# Altium PCB SiLPA_HE.PcbDoc (part 7 of 10)
Units mm, origin at the board's own origin, x right, y up, seen from the top; angles counter-clockwise.
Board outline 222.47 x 100.01 mm, 4 copper layers (Top Layer, Int1 (GND), Int2 (PWR), Bottom Layer), stack 1.508 mm thick; 661 components, 355 nets, 1925 pads, 1744 vias.
Unrouted connection lines stored in the file: 360.
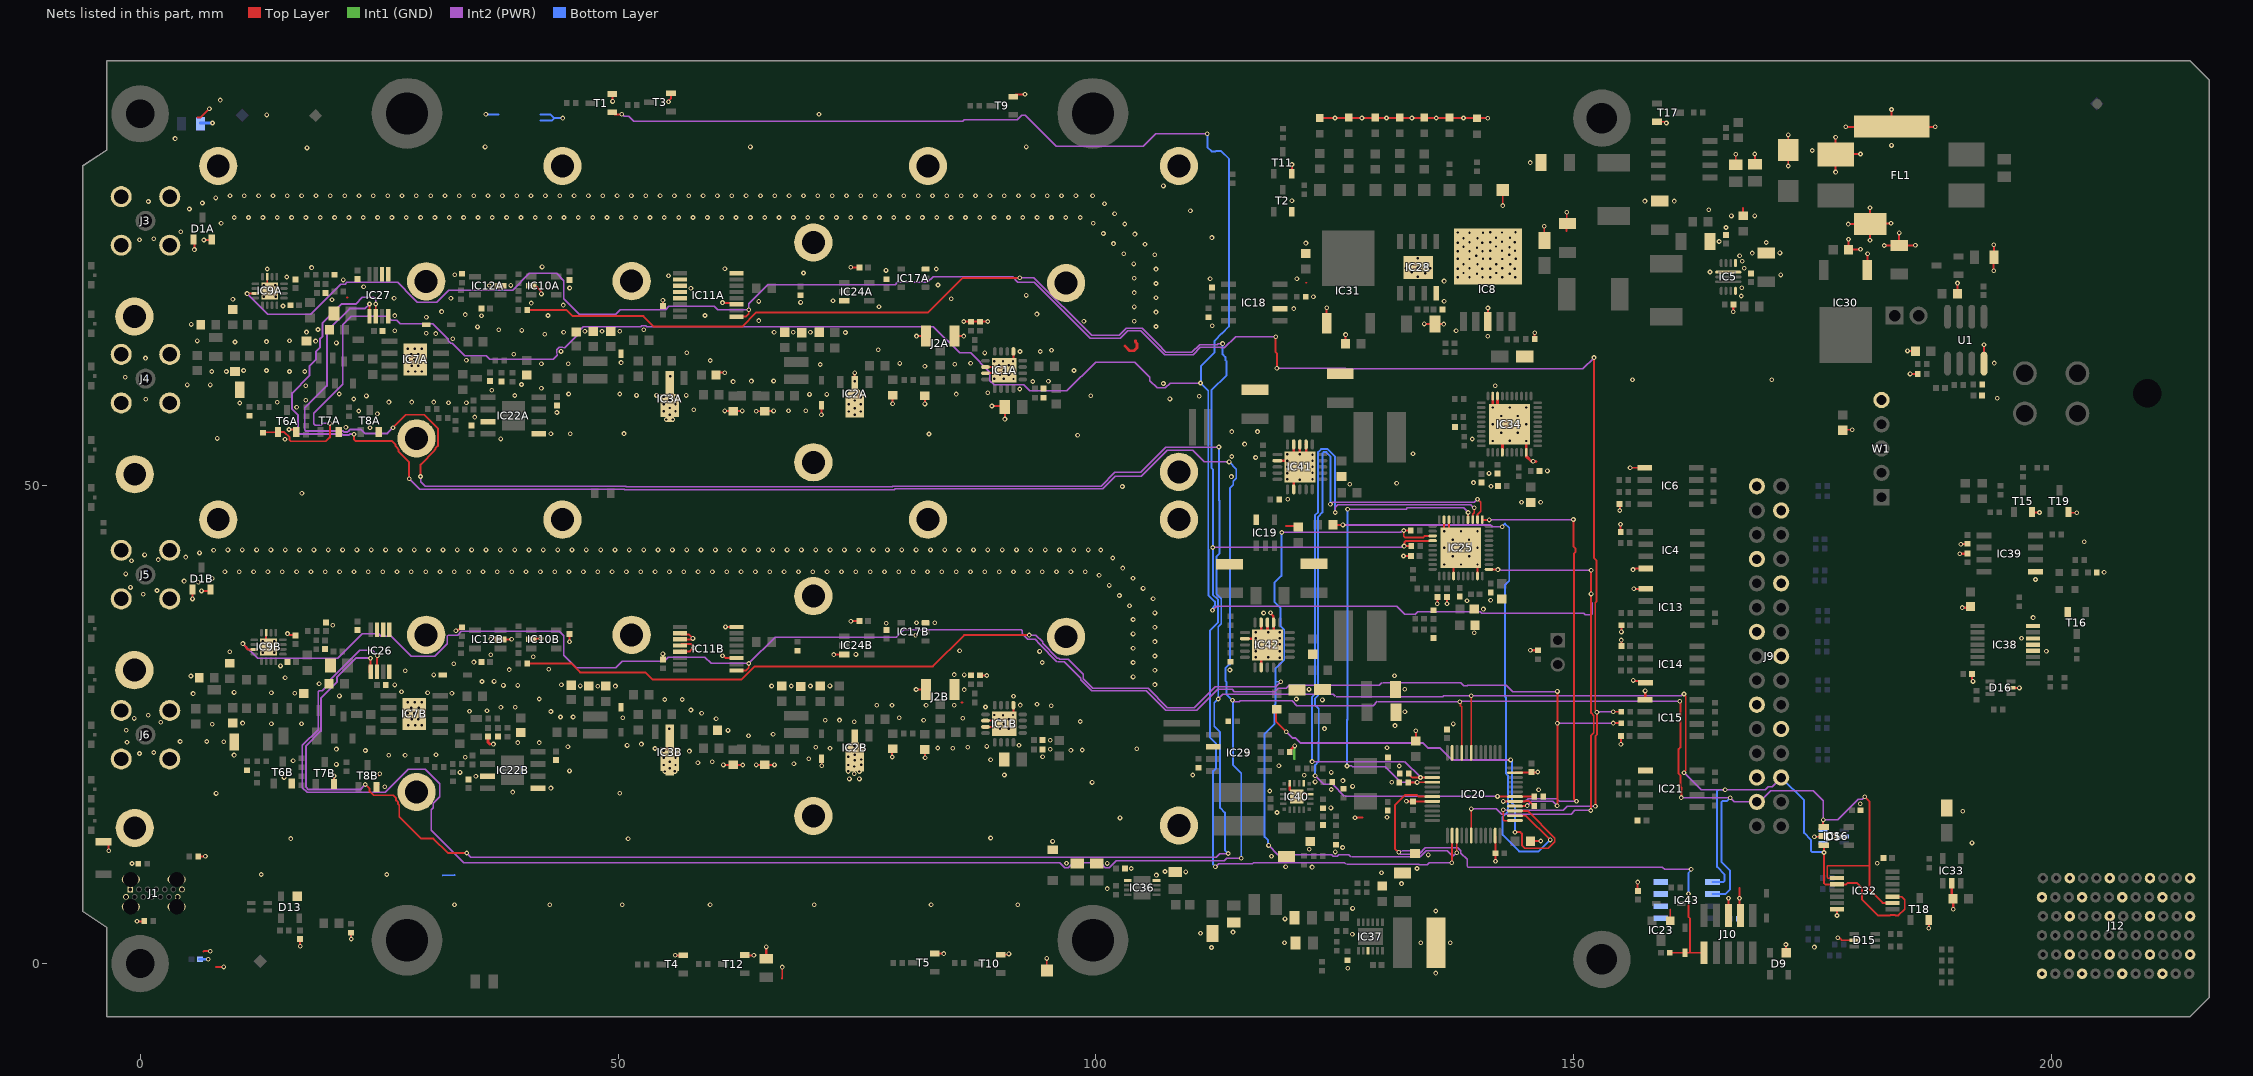
[diagram p6: the nets of this part, all layers, seen from the top]

## Via types
v1: diameter 0.5, hole 0.25, Top Layer to Bottom Layer, tented both sides, 1439 vias
v2: diameter 0.5, hole 0.25, Top Layer to Bottom Layer, tented bottom, 291 vias
v3: diameter 0.5, hole 0.25, Top Layer to Bottom Layer, 12 vias
v4: diameter 0.5, hole 0.25, Top Layer to Bottom Layer, tented top, 2 vias

## Nets (pads, with @x,y where several pads share a name; then routed paths per layer and width w, separated by ;. In a path a pad name is that pad's centre, name@x,y a point inside that pad or via, vN(x,y) a via of type N, cw(c..) or ccw(c..) an arc to the next point about the centre after c; other vN are vias at no path point) (continued)
CH0_VDD_EN: IC20.26 R171.1 | length 62.5
  Top Layer w0.2: R171.1@124.795,45.893 v1(125.832,45.893) ; IC20.26@143.838,15.468 144.984,15.468 v1(147.514,12.939)
  Int2 (PWR) w0.2: v1(125.832,45.893) 141.235,45.893 141.433,45.696 v1(142.503,45.696)
  Bottom Layer w0.2: v1(142.503,45.696) 142.503,45.751 142.786,46.034 143.238,45.583 143.238,40.029 142.784,39.575 142.784,27.928 142.896,27.816 142.896,19.859 143.09,19.666 143.09,15.902 142.544,15.356 142.544,13.452 144.267,11.728 146.303,11.728 v1(147.514,12.939)
CH1_VDD_EN: IC20.27 R172.1 | length 46.7
  Top Layer w0.2: R172.1@118.84,26.638 118.84,25.324 v1(119.915,24.249) ; v1(143.838,13.744) 144.406,13.744 144.556,13.594 144.556,12.382 144.869,12.069 147.319,12.069 147.991,12.741 147.991,13.136 145.159,15.968 IC20.27@143.838,15.968
  Int2 (PWR) w0.2: v1(119.915,24.249) 120.57,23.594 120.883,23.594 121.388,23.089 ; 121.475,23.064 134.221,23.064 134.726,22.559 135.945,22.559 137.2,21.303 v1(143.377,21.303)
  Bottom Layer w0.2: v1(143.377,21.303) 143.389,21.315 143.531,21.174 143.531,16.764 143.838,16.456 v1(143.838,13.744)
CPU_nRST: D10.2 IC20.7 J10.10 R66.2 | length 56.9
  Top Layer w0.2: v1(131.666,11.636) 131.277,12.025 131.277,16.548 132.369,17.641 133.575,17.641 133.748,17.468 IC20.7@135.188,17.468 ; R66.2@160.049,1.132 D10.2@161.609,1.132 162.154,1.132 ; v1(161.987,7.299) 161.987,4.88 162.154,4.714 162.154,1.132 ; J10.10@163.627,1.132 162.154,1.132
  Int2 (PWR) w0.15: v1(131.666,11.636) 131.761,11.636 131.891,11.765 131.909,11.765 131.955,11.811 ; v1@131.753,11.436 133.798,11.436 ; 132.041,11.786 133.848,11.786 133.936,11.698 133.936,11.574 133.798,11.436 ; v1(162.259,9.868) 159.477,9.868 159.25,10.095 138.916,10.095 138.828,10.183 138.828,10.903 138.183,11.548 138.183,11.786 137.872,12.097 134.459,12.097 133.798,11.436
  Bottom Layer w0.2: v1(161.987,7.299) 161.987,9.501 162.259,9.773 v1(162.259,9.868)
DAC_OUT1: IC20.14 IC25.24 R52A.1 R87.2 | length 189.4
  Top Layer w0.2: R52A.1@40.501,68.363 44.632,68.363 45.25,67.745 52.398,67.745 ; 51.844,67.735 52.661,67.735 53.749,66.646 62.969,66.646 64.42,68.098 73.694,68.098 73.699,68.093 82.407,68.093 86.057,71.743 v1(92.027,71.743) ; v1@132.35,43.815 132.49,43.676 ; R87.2@132.983,43.676 132.49,43.676 ; IC25.24@135.217,44.243 135.198,44.224 134.827,44.224 134.816,44.213 132.405,44.213 132.288,44.096 132.288,43.733 v1(132.231,43.676) 132.49,43.676 ; v1(137.228,10.547) 137.245,10.565 137.245,13.376 IC20.14@137.263,13.393
  Int2 (PWR) w0.15: v1(92.027,71.743) 93.506,71.743 99.533,65.717 102.441,65.717 103.188,66.463 104.816,66.463 106.447,64.832 106.451,64.832 107.316,63.967 110.038,63.967 110.834,64.762 112.693,64.762 112.769,64.839 113.224,64.839 v1(113.248,64.862) ; v1(112.224,43.529) 131.989,43.529 132.203,43.743 v1@132.215,43.743 ; v1(112.491,10.12) 112.535,10.12 112.851,10.436 116.371,10.436 116.507,10.572 125.981,10.572 126.129,10.423 ; 126.216,10.397 133.774,10.397 133.813,10.359 134.678,10.359 134.867,10.547 v1(137.228,10.547)
  Bottom Layer w0.2: v1(112.491,10.12) 112.491,10.145 112.253,10.382 112.253,20.14 112.558,20.445 112.558,23.016 111.917,23.657 111.917,34.836 112.775,35.695 112.775,38.049 112.224,38.6 v1(112.224,43.529) 112.224,51.715 112.074,51.865 112.074,59.971 113.655,61.552 113.655,63.003 113.53,63.128 113.53,63.452 113.254,63.728 113.254,64.855 v1(113.248,64.862)
DAC_OUT2: IC20.15 IC25.23 R52B.1 R88.2 | length 161.1
  Top Layer w0.2: R52B.1@40.509,31.395 45.116,31.395 46.04,30.471 52.852,30.471 53.618,29.705 62.898,29.705 64.291,31.098 82.944,31.098 86.213,34.367 v1(93.027,34.367) ; R88.2@132.927,45.303 v1(132.197,45.303) 132.197,44.712 132.339,44.57 134.246,44.57 134.419,44.743 IC25.23@135.217,44.743 ; v1(137.731,11.599) 137.747,11.615 137.747,13.377 IC20.15@137.763,13.393
  Int2 (PWR) w0.15: v1(93.027,34.367) 93.706,34.367 94.417,33.656 94.417,33.506 95.955,31.968 96.105,31.968 96.235,31.838 96.298,31.838 97.109,31.838 98.669,30.277 98.669,29.784 99.653,28.8 105.455,28.8 107.476,26.78 110.267,26.78 112.454,28.967 118.796,28.967 v1(119.32,29.491) ; v1(118.061,12.367) 119.018,11.41 124.663,11.41 124.842,11.231 125.216,11.231 125.395,11.41 126.42,11.41 126.647,11.184 ; v1(119.427,45.098) 131.897,45.098 132.103,45.303 v1(132.197,45.303) ; 126.733,11.159 133.912,11.159 134.574,11.82 136.725,11.82 136.95,11.595 137.277,11.269 137.401,11.269 v1(137.731,11.599)
  Bottom Layer w0.2: v1(118.061,12.367) 118.004,12.424 118.004,12.884 117.639,13.249 117.639,24.033 118.661,25.054 118.661,27.042 118.764,27.145 118.764,29.484 ; v1(119.32,29.491) 119.314,29.484 118.764,29.484 ; 119.34,40.542 118.656,39.858 118.656,37.842 119.298,37.2 119.298,35.318 119.697,34.919 119.697,31.798 118.764,30.865 118.764,29.484 ; 119.427,40.516 v1(119.427,45.098)
DET_RST0: IC9A.15 IC11A.1 IC20.25 R47.1 | length 223.7
  Top Layer w0.152: v1(142.613,16.099) 142.613,15.057 142.702,14.968 IC20.25@143.838,14.968
  Top Layer w0.2: v1(11.197,70.091) 12.023,70.091 IC9A.15@12.052,70.119 ; IC11A.1@62.377,67.668 62.386,67.677 63.285,67.677 63.287,67.679 63.374,67.679 63.677,67.982 v1(63.677,68.395) ; v1(118.802,65.568) 118.802,63.956 118.931,63.827 v1(118.931,62.269) ; v1(152.102,63.396) 152.102,42.421 152.373,42.15 152.373,37.906 152.228,37.761 152.228,26.55 152.406,26.371 152.406,23.946 152.252,23.791 v1(152.252,16.468) ; v1(154.105,26.343) R47.1@154.956,26.343
  Int2 (PWR) w0.15: v1(11.197,70.091) 13.351,67.937 17.86,67.937 20.502,70.58 20.519,70.58 21.01,71.071 21.442,71.071 21.638,71.267 26.937,71.267 27.724,70.48 27.724,70.464 29.014,69.173 31.04,69.173 32.308,70.441 38.972,70.441 40.731,72.201 43.581,72.201 44.336,71.445 44.336,69.551 45.95,67.937 49.749,67.937 50.229,68.417 54.968,68.417 55.322,68.771 60.061,68.771 60.437,68.395 v1(63.677,68.395) 63.677,69.041 65.641,71.005 78.989,71.005 79.236,71.252 82.344,71.252 82.954,71.861 91.268,71.861 91.839,71.29 93.544,71.29 99.396,65.437 102.485,65.437 102.488,65.44 102.556,65.44 103.302,66.186 104.701,66.186 107.2,63.687 110.154,63.687 110.922,64.455 113.048,64.455 113.095,64.409 113.435,64.409 114.621,65.594 v1@118.802,65.594 ; v1(118.931,62.269) 126.06,62.269 126.106,62.223 150.929,62.223 v1(152.102,63.396) ; v1(142.613,16.099) 142.65,16.062 148.871,16.062 149.277,16.468 v1(152.252,16.468) ; v1(152.406,26.29) 152.459,26.343 v1@154.105,26.343
DET_RST1: IC9B.15 IC11B.1 IC20.28 R45.1 | length 179.1
  Top Layer w0.2: v1(10.752,33.479) 11.117,33.113 11.117,32.99 11.235,32.873 IC9B.15@11.942,32.873 ; IC11B.1@62.377,30.668 63.301,30.668 63.302,30.669 63.389,30.669 63.677,30.957 v1(63.677,31.395) ; IC20.28@143.838,16.468 143.866,16.496 145.08,16.496 v1(145.111,16.527) ; v1(148.24,16.516) 148.27,16.545 v1(148.27,25.139) 148.27,28.469 v1(148.275,28.474) ; v1(154.105,25.158) 154.938,25.158 R45.1@154.957,25.139
  Int2 (PWR) w0.15: v1(10.752,33.479) 12.295,31.936 20.658,31.936 23.215,34.493 24.976,34.493 25.064,34.405 25.064,34.337 25.152,34.249 26.299,34.249 28.38,32.168 30.849,32.168 32.152,33.471 32.152,34.278 32.24,34.366 33.221,34.366 33.621,34.767 43.836,34.767 44.294,34.308 44.294,32.248 45.604,30.937 49.749,30.937 50.427,31.615 54.817,31.615 55.258,32.056 59.079,32.056 59.74,31.395 v1(63.677,31.395) 66.423,34.141 79.125,34.141 79.905,34.921 92.186,34.921 92.274,34.833 92.274,34.481 92.84,33.915 93.628,33.915 94.117,33.427 94.117,33.382 95.92,31.579 ; 95.985,31.559 96.702,31.559 98.392,29.869 98.392,29.669 99.536,28.525 105.282,28.525 107.302,26.505 110.558,26.505 112.74,28.687 114.26,28.687 114.491,28.456 118.709,28.456 119.049,28.796 119.882,28.796 120.222,29.136 129.646,29.136 129.903,29.392 ; 129.99,29.367 138.15,29.367 138.455,29.062 138.829,29.062 138.897,29.13 142.918,29.13 143.616,28.431 148.232,28.431 v1(148.275,28.474) ; v1(145.111,16.527) 145.558,16.975 147.781,16.975 v1(148.24,16.516) ; v1(148.27,25.139) 148.279,25.149 154.095,25.149 v1(154.105,25.158)
EEM0_I2C.SCL: D5.6 IC16.1 IC20.45 IC26.2 IC27.2 IC32.2 IC32.9 IC43.6 J9.27 | length 417.9
  Top Layer w0.152: IC32.2@177.527,8.943 176.573,8.943 176.48,9.036 176.48,10.159 176.573,10.252 180.925,10.252
  Top Layer w0.2: v1(22.372,55.382) 22.372,54.832 22.513,54.691 26.325,54.691 26.708,54.308 26.708,54.169 26.945,53.932 26.945,53.866 27.029,53.782 27.029,53.573 28.146,52.456 v1(28.146,50.731) ; IC27.2@24.65,67.727 v1(24.65,69.001) ; IC26.2@24.775,30.525 24.802,30.552 24.802,32.193 v1(24.829,32.219) ; v1(138.051,27.399) 138.118,27.332 138.118,26.994 138.263,26.849 IC20.45@138.263,22.043 ; v1(161.067,27.439) 161.13,27.376 161.13,22.623 160.955,22.448 160.955,19.859 161.154,19.659 161.154,18.535 161.24,18.449 v1(161.24,17.36) ; J9.27@169.052,17.043 J9.27@169.452,17.043 ; v1(176.074,15.032) 176.074,14.351 IC16.1@176.137,14.287 ; v1(180.427,17.443) 180.925,16.945 180.925,10.252 180.925,7.722 182.304,6.343 IC32.9@183.327,6.343
  Int2 (PWR) w0.15: v1(24.829,32.219) 24.282,32.766 22.966,32.766 19.457,29.256 19.457,28.967 19.03,28.54 18.74,28.54 18.619,28.418 18.619,24.468 16.97,22.819 16.97,18.418 17.488,17.9 25.626,17.9 28.038,20.311 29.845,20.311 31.346,18.811 31.346,17.451 30.658,16.763 30.658,16.303 30.454,16.099 30.454,13.944 33.85,10.547 96.224,10.547 96.727,10.045 97.102,10.045 97.605,10.547 100.474,10.547 100.99,10.032 101.364,10.032 102.108,10.775 113.443,10.775 113.693,11.026 v1(115.195,11.026) ; v1(28.146,50.731) 29.265,49.612 50.663,49.612 50.707,49.568 78.905,49.568 79.012,49.675 100.728,49.675 101.872,50.819 101.875,50.819 102.03,50.975 104.735,50.975 107.45,53.689 110.111,53.689 111.321,52.48 v1(113.924,52.48) ; v1(114.279,27.548) 114.366,27.548 114.542,27.372 114.969,27.372 115.096,27.498 120.514,27.498 121.024,26.989 128.999,26.989 129.435,27.424 ; 129.522,27.399 v1(138.051,27.399) 138.071,27.419 161.047,27.419 v1(161.067,27.439) ; v1(161.24,17.36) 161.249,17.351 166.323,17.351 v1@166.353,17.321 ; v1(166.353,17.341) 166.773,16.921 J9.27@169.141,16.921 ; J9.27@169.455,16.921 170.602,18.068 175.052,18.068 176.074,17.047 v1@176.074,15.217 ; v1(176.074,15.032) 177.627,15.032 179.765,17.17 180.154,17.17 v1(180.427,17.443)
  Int2 (PWR) w0.2: v1@22.361,55.382 21.934,55.382 21.858,55.307 21.196,55.307 21.12,55.382 16.681,55.382 16.51,55.553 16.51,57.39 15.897,58.004 15.897,59.687 17.704,61.495 17.704,62.505 18.418,63.22 18.418,64.062 18.834,64.478 18.834,65.392 19.083,65.641 19.083,67.023 21.053,68.993 22.535,68.993 23.248,69.706 24.422,69.706 24.65,69.478 v1(24.65,69.001)
  Bottom Layer w0.15: D5.6@176.074,13.949 D5.6@176.08,13.943
  Bottom Layer w0.2: 113.921,31.296 113.531,30.906 113.531,29.601 113.644,29.488 113.644,28.183 v1(114.279,27.548) ; v1(113.924,52.48) 114.677,51.727 114.677,50.773 114.361,50.458 114.361,50.101 114.008,49.748 114.008,31.271 ; v1@114.343,27.548 114.343,20.764 115.195,19.912 v1(115.195,11.026) ; IC43.6@164.492,7.273 165.852,7.273 166.312,7.732 166.312,9.738 165.422,10.628 165.422,16.884 165.539,17.001 166.013,17.001 v1(166.353,17.341) ; D5.6@176.074,13.949 v1(176.074,15.032)
EEM0_I2C.SDA: D5.4 IC16.3 IC20.43 IC26.1 IC27.1 IC32.3 IC32.10 IC43.5 J9.26 | length 405
  Top Layer w0.2: v1(23.552,18.735) 24.016,18.272 24.016,18.014 24.423,17.607 26.458,17.607 26.78,17.285 26.78,17.062 26.985,16.856 26.985,16.693 27.108,16.57 27.108,15.402 27.108,15.371 27.167,15.313 29.398,13.082 30.674,13.082 32.183,11.573 v1(34.163,11.573) ; IC26.1@23.999,30.471 23.999,31.116 24.103,31.221 v1(24.103,31.948) ; IC27.1@24,67.727 v1(24,69.001) ; v1(26.454,56.054) 27.816,57.416 29.724,57.416 31.154,55.987 31.154,54.15 30.891,53.887 30.891,53.832 30.815,53.757 30.815,53.685 29.339,52.208 v1(29.339,50.958) ; IC20.43@139.263,22.043 v1(139.263,28.021) ; v1(161.52,19.968) 161.52,20.049 161.702,20.231 161.702,27.944 161.52,28.126 v1(161.52,28.207) ; IC16.3@176.265,12.424 176.158,12.318 v1(176.158,11.623) 176.158,8.427 176.292,8.293 IC32.3@177.527,8.293 178.488,8.293 178.615,8.42 179.632,8.42 180.13,7.922 180.13,6.71 181.805,5.035 183.091,5.035 183.155,5.099 183.55,5.099 183.614,5.035 183.955,5.035 184.607,5.686 184.607,6.659 184.273,6.993 IC32.10@183.327,6.993
  Int2 (PWR) w0.15: v1(29.339,50.958) 29.339,50.41 29.812,49.937 50.798,49.937 50.842,49.893 78.663,49.893 78.72,49.95 100.54,49.95 101.985,51.395 104.66,51.395 107.305,54.039 v1(112.862,54.039) ; v1(34.163,11.573) 34.593,11.143 112.573,11.143 112.945,11.515 v1(113.84,11.515) ; v1(112.789,27.682) 113.284,28.177 124.829,28.177 125.055,27.951 ; 125.142,27.926 136.273,27.926 136.368,28.021 v1(139.263,28.021) 161.24,28.021 161.426,28.207 v1(161.52,28.207) ; v1(161.52,19.968) 163.3,18.188 v1(165.812,18.188) 169.995,18.188 170.316,18.51 170.73,18.51 J9.26@171.681,19.461
  Int2 (PWR) w0.2: v1(23.552,18.735) 23.024,18.207 17.608,18.207 17.367,18.448 17.367,22.789 18.921,24.343 18.921,27.772 20.619,29.47 20.619,29.991 22.576,31.948 v1(24.103,31.948) ; v1(24,69.001) 23.519,68.52 21.911,68.52 19.532,66.141 19.532,60.438 17.227,58.133 17.227,55.825 17.345,55.707 21.255,55.707 21.33,55.632 21.724,55.632 21.799,55.707 21.802,55.707 21.952,55.857 23.119,55.857 23.511,55.466 25.866,55.466 v1(26.454,56.054)
  Bottom Layer w0.2: v1(112.862,54.039) 112.862,48.475 112.936,48.401 112.936,42.917 112.592,42.573 112.592,38.695 113.102,38.184 113.102,35.559 112.789,35.246 v1(112.789,27.682) 112.369,27.262 112.369,24.84 112.99,24.219 112.99,16.295 113.485,15.799 113.485,11.87 v1(113.84,11.515) ; IC43.5@164.492,8.543 165.649,8.543 165.766,8.66 165.766,9.317 164.972,10.112 164.972,18.071 165.089,18.188 v1(165.812,18.188) ; J9.26@171.681,19.461 174.081,17.061 174.081,13.67 174.798,12.953 174.798,11.797 174.916,11.68 176.101,11.68 v1(176.158,11.623) 176.158,12.564 D5.4@176.08,12.643
GND: B5A.1 B5B.1 B6A.1 B6B.1 B7A.1 B7B.1 B8A.1 B8B.1 B9A.1 B9B.1 B10A.1 B10B.1 B11A.1 B11B.1 B12A.1 B12B.1 B13A.1 B13B.1 B14A.1 B14B.1 B15A.1 B15B.1 B16A.1 B16B.1 B17A.1 B17B.1 C2A.1 C2B.1 C4A.1 C4B.1 C5A.1 C5B.1 C6A.1 C6B.1 C7A.1 C7B.1 C8A.1 C8B.1 C9A.1 C9B.1 C10.1 C17A.2 C17B.2 C18A.1 C18B.1 C19A.1 C19B.1 C21.1 C22.1 C23.1 C24.1 C25.1 C27.2 C28.1 C29.1 C30.1 C31.2 C32.1 C33.1 C34.1 C35.1 C36.2 C37.1 C38.1 C39.1 C40.1 C42A.1 C42B.1 C43A.1 C43B.1 C45A.1 C45B.1 C46A.1 C46B.1 C47A.1 C47B.1 C48A.1 C48B.1 C53A.1 C53B.1 C55A.2 C55B.2 C56A.1 C56B.1 C57A.2 C57B.2 C58A.1 C58B.1 C59A.1 C59B.1 C60A.2 C60B.2 C61A.1 C61B.1 C62.1 C63.1 C64.1 C65.1 C66.2 C68.1 C69.1 C70.1 C71.2 C72.2 C73.2 C74.1 C75.1 C76.1 C77.2 C78.1 C79.2 C80.2 C81.2 C82.1 C83.1 C84.1 C85.1 C87.1 C88.2 C89.1 C90.1 C91.1 C92.1 C93.1 C94.1 C95.1 C96.2 C97.1 C98.1 C100.1 C101.1 C102.1 C103.1 C104.1 C105.1 C106.2 C107.2 C112.1 C113.1 C114.1 C116.1 C117A.1 C117B.1 C118A.1 C118B.1 C120A.1 C120B.1 C121A.1 C121B.1 C123.1 C124.1 C125.1 C126.1 C127.1 C128.1 C129.1 C132.2 C135.1 C136.1 C137.1 C138.1 C139.1 C140.1 C141.1 C142.2 C144.1 C145.1 C146.1 C147.1 C149.1 C154.1 C155.1 C165.1 C166.1 C167.1 C245A.2 C245B.2 D1A.1 D1A.2 D1B.1 D1B.2 D2A.1 D2B.1 D3A.1 D3B.1 D4.2 D5.2 D8A.1 D8B.1 D9.1 D13.1 D15.2 D16.2 D18A.2 D18B.2 D19.1 FL1.4 IC1A.5 IC1A.10 IC1A.11 IC1A.17 IC1B.5 IC1B.10 IC1B.11 IC1B.17 IC2A.2 IC2B.2 IC3A.2 IC3A.4 IC3B.2 IC3B.4 IC4.4 IC5.3 IC5.4 IC5.11 IC6.5 IC7A.9 IC7B.9 IC8.3 IC8.6 IC9A.11 IC9A.17 IC9B.11 IC9B.17 IC10A.2 IC10B.2 IC11A.3 IC11A.8 IC11A.10 IC11A.11 IC11A.12 IC11A.13 IC11B.3 IC11B.8 IC11B.10 IC11B.11 IC11B.12 IC11B.13 IC12A.2 IC12B.2 IC13.5 IC14.4 IC15.5 IC16.2 IC17A.3 IC17B.3 IC18.2 IC19.5 IC20.8 IC20.23 IC20.35 IC20.47 IC21.5 IC22A.3 IC22A.5 IC22B.3 IC22B.5 IC23.1 IC24A.3 IC24B.3 IC25.18 IC25.19 IC25.34 IC25.39 IC25.41 IC26.4 IC26.5 IC26.6 IC26.7 IC27.4 IC27.5 IC27.6 IC28.8 IC28.9 IC29.2 IC30.1 IC31.1 IC32.7 IC33.2 IC34.18 IC34.19 IC34.34 IC34.39 IC34.41 IC36.4 IC36.5 IC37.9 IC38.3 IC38.4 IC38.5 IC38.7 IC39.1 IC40.3 IC40.5 IC40.8 IC40.17 IC41.2 IC41.7 IC41.17 IC41.18 IC41.19 IC41.21 IC42.2 IC42.7 IC42.17 IC42.18 IC42.19 IC42.21 IC43.1 IC43.2 IC43.3 IC43.4 J1.1 J1.2 J1.3 J1.4 J1.A1 J1.A12 J1.B1 J1.B12 J2A.2 J2B.2 J3.2 J4.2 J5.2 J6.2 J9.1 J9.4 J9.7 J9.10 J9.13 J9.16 J9.19 J9.22 J9.25 J10.3 J10.5 J12.A2 J12.A4 J12.A6 J12.C1 J12.C5 J12.D2 J12.D4 J12.D6 J12.F1 J12.F5 J12.G2 J12.G4 J12.G6 J12.I1 J12.I5 J12.J2 J12.J4 J12.J6 J12.L1 J12.L5 L20.2 LD11.1 LD12.1 LD13.1 LD14.1 LD15.1 LD16.1 LD18.1 R1A.1 R1B.1 R2A.1 R2B.1 R7A.1 R7B.1 R8A.1 R8B.1 R9A.1 R9B.1 R10A.1 R10B.1 R13.2 R27A.1 R27B.1 R30.1 R33A.1 R33B.1 R58.1 R63.2 R68.1 R70.2 R76.1 R77.1 R78.1 R81.1 R83.1 R91.1 R94.2 R95.2 R131.2 R132.1 R136.2 R141A.1 R141B.1 R144.1 R152.1 R157.1 R161.1 R164A.1 R164B.1 R166A.1 R166B.1 R174.2 R175.2 R176.2 R177.2 R180.2 R181.2 SW1.2 T1.2 T2.2 T3.2 T4.2 T5.2 T6A.2 T6B.2 T7A.2 T7B.2 T8A.2 T8B.2 T9.2 T10.2 T11.2 T12.2 T15.2 T16.2 T17.2 T18.2 T19.2 TP22.1 TP23.1 U1.4 W1.5 | length 259.3
  Top Layer w0.2: SW1.2@-4.073,12.763 -3.623,12.763 -3.323,12.463 -3.323,11.843 v1(-3.275,11.795) ; v1(-0.323,4.418) 0.402,4.418 R95.2@0.427,4.443 ; D1B.1@5.477,39.13 5.483,39.124 v1(5.483,38.153) ; v1(5.677,74.693) 5.677,75.648 D1A.1@5.589,75.736 D1A.1@5.692,75.839 ; 5.977,88.533 6.341,88.533 v1(7.248,89.44) ; R13.2@6.097,11.197 6.118,11.218 v1(6.827,11.218) ; v1(6.427,38.987) 7.234,38.987 D1B.2@7.377,39.13 ; 6.627,1.237 6.691,1.301 v1(7.349,1.301) ; v1(6.677,75.693) 7.445,75.693 D1A.2@7.489,75.736 ; 7.917,-0.387 7.954,-0.35 v1(8.746,-0.35) ; IC9B.11@13.192,34.623 13.192,33.903 IC9B.17@13.252,33.843 ; IC9A.11@13.302,71.869 13.302,71.149 IC9A.17@13.362,71.089 ; v1(15.415,34.524) 15.509,34.524 15.664,34.368 16.203,34.368 C60B.2@16.238,34.333 ; v1(16.747,1.809) C74.1@16.747,2.571 ; T7B.2@20.275,18.496 v1(20.275,19.625) ; v1@21.47,56.05 v1(21.527,56.107) ; 21.621,69.682 21.679,69.682 ; v1(22.081,2.571) R70.2@22.081,3.244 ; v1(24.05,56.065) v1@24.065,56.05 ; T8B.2@24.739,18.494 T8B.2@24.964,18.719 ; T8A.2@24.747,56.05 24.972,55.825 T8A.2@24.972,55.625 ; v1@24.964,19.657 25.076,19.769 v1(25.076,19.85) ; v1(33.033,34.818) 33.127,34.818 33.259,34.949 33.463,34.949 R33B.1@33.677,35.163 ; R33A.1@33.587,72.073 R33A.1@33.677,72.163 ; v1(36.677,33.943) 37.682,33.943 IC12B.2@37.713,33.912 37.724,33.923 v1(38.864,33.923) ; IC12A.2@37.682,70.943 IC12A.2@37.713,70.912 IC12A.2@37.748,70.948 ; IC10B.2@40.917,33.923 41.002,34.008 v1(41.927,34.008) ; v1(44.927,33.657) C61B.1@44.927,34.493 ; C61A.1@44.927,71.493 C61A.1@44.929,71.491 ; T1.2@49.412,90.963 49.427,90.948 v1(49.427,90.193) ; C56B.1@54.695,31.793 v1(54.695,32.399) ; C56A.1@54.695,68.793 v1(54.695,69.399) ; v1(55.277,90.168) 55.277,90.259 55.541,90.524 T3.2@55.541,91.052 ; v1(55.988,0.861) T4.2@56.813,0.861 ; IC11B.13@56.477,32.618 56.626,32.767 56.725,32.667 56.825,32.767 56.924,32.667 57.525,32.667 v1(57.896,33.038) 57.896,33.132 57.775,33.253 57.775,33.289 57.63,33.433 57.215,33.433 57.198,33.417 56.626,33.417 IC11B.12@56.477,33.268 ; IC11B.11@56.477,33.918 57.64,33.918 57.67,33.948 57.704,33.948 57.734,33.918 v1(57.83,34.014) 57.425,34.419 56.626,34.419 IC11B.10@56.477,34.568 ; C2A.1@60.237,61.563 60.489,61.815 v1(61.154,61.815) ; v1(60.927,32.193) 61.021,32.193 61.246,31.968 IC11B.3@62.377,31.968 ; v1(60.927,69.149) 60.959,69.117 62.228,69.117 IC11A.3@62.377,68.968 ; v1(61.021,20.783) R10B.1@62.037,20.783 62.046,20.774 v1(63.051,20.774) ; v1(61.154,57.823) 61.997,57.823 R10A.1@62.037,57.783 62.077,57.823 v1(62.987,57.823) ; v1(61.246,35.218) IC11B.8@62.377,35.218 ; T12.2@63.265,0.901 63.305,0.861 v1(64.217,0.861) ; v1(64.467,20.783) R9B.1@65.357,20.783 v1(66.363,20.783) ; v1(64.467,57.783) R9A.1@65.357,57.783 65.397,57.823 v1(66.273,57.823) ; 67.137,-1.557 67.177,-1.517 v1(67.177,-0.367) ; D2B.1@71.277,21.423 71.308,21.392 v1(71.308,20.693) ; v1(71.277,57.424) D2A.1@71.277,58.423 ; v1(72.575,32.324) 73.646,32.324 IC24B.3@73.66,32.338 ; v1(74.335,72.836) 75.242,72.836 C245A.2@75.26,72.818 ; v1(74.36,35.818) C245B.2@75.26,35.818 ; v2@74.752,61.743 74.752,60.796 IC2A.2@74.76,60.787 ; C58A.1@78.034,71.626 C58A.1@78.067,71.593 ; v1(78.677,21.612) 78.677,22.413 R8B.1@78.727,22.463 ; v1(78.727,58.567) R8A.1@78.727,59.463 ; v1(81.184,28.67) 82.225,28.67 J2B.2@82.232,28.663 ; v1(81.221,65.648) 82.217,65.648 J2A.2@82.232,65.663 ; R7B.1@82.097,22.393 82.127,22.363 v1(82.127,21.543) ; R7A.1@82.097,59.393 82.107,59.383 v1(82.107,58.55) ; T5.2@83.127,1.043 v1(84.077,1.043) ; J2B.2@85.182,28.088 J2B.2@85.182,28.663 ; J2A.2@85.182,65.663 85.197,65.648 v1(86.177,65.648) ; 85.936,27.334 86.015,27.334 ; v1(86.177,67.168) 86.922,67.168 R1A.1@86.927,67.163 87.857,67.163 R2A.1@87.867,67.153 87.882,67.168 v1(88.684,67.168) ; R1B.1@86.891,30.199 R1B.1@86.927,30.163 86.947,30.163 R1B.1@87.161,30.377 ; R2B.1@87.847,30.153 R2B.1@87.867,30.153 87.885,30.135 v1(88.581,30.135) ; IC1B.11@88.439,24.764 89.406,24.764 IC1B.17@89.427,24.743 ; IC1B.10@88.439,25.414 89.398,25.414 IC1B.17@89.427,25.443 ; IC1A.11@88.439,61.764 89.406,61.764 IC1A.17@89.427,61.743 ; IC1A.10@88.439,62.414 89.398,62.414 IC1A.17@89.427,62.443 ; v1(89.11,58.327) 90.174,58.327 90.474,58.027 v1(90.474,56.962) ; T10.2@90.019,0.919 90.746,0.919 90.836,1.009 v1(90.889,1.009) ; IC1B.17@90.235,25.243 IC1B.17@90.389,25.089 ; IC1A.17@90.235,62.243 IC1A.17@90.389,62.089 ; IC1B.17@91.327,26.143 91.364,26.18 IC1B.5@91.364,27.039 ; IC1A.17@91.327,63.143 91.364,63.18 IC1A.5@91.364,64.039 ; T9.2@91.368,90.693 91.591,90.917 92.553,90.917 v1(92.58,90.943) ; C17B.2@94.173,23.607 C17B.2@94.407,23.373 ; v1(94.852,0.543) 94.852,-0.692 TP23.1@94.877,-0.717 ; 119.849,45.773 C70.1@121.035,45.773 ; T11.2@120.493,82.629 v1(120.493,83.599) ; v1(120.914,17.504) 121.164,17.754 IC40.3@122.314,17.754 ; 121.984,71.223 122.009,71.223 ; IC31.1@124.134,66.986 v1(124.134,68.615) ; C97.1@126.114,64.853 v1(126.114,65.797) ; v1(127.097,15.265) 127.862,15.265 127.865,15.268 ; R78.1@131.658,18.973 R78.1@131.705,19.021 ; v1(132.175,42.643) C83.1@132.85,42.643 ; v1@132.56,16.968 IC20.8@135.188,16.968 ; C94.1@133.375,11.368 C94.1@133.597,11.146 ; C78.1@133.46,23.264 v1(133.46,24.356) ; v1(134.352,66.919) 135.473,66.919 C30.1@135.476,66.922 135.496,66.903 v1(136.371,66.903) ; v1(135.711,37.643) 135.711,38.337 C85.1@135.717,38.343 ; IC25.19@136.417,46.443 136.417,45.243 IC25.41@136.917,44.743 ; C84.1@136.717,38.351 136.721,38.347 v1(136.721,37.643) ; IC25.18@136.917,46.443 IC25.41@136.917,44.743 ; IC25.34@137.417,40.543 137.417,42.743 IC25.41@138.167,43.493 ; IC25.39@139.917,40.543 139.917,41.743 IC25.41@138.167,43.493 ; IC8.3@140.993,67.183 141.005,67.195 v1(141.005,68.583) ; IC20.23@141.763,13.393 141.779,13.377 141.779,10.715 v1(141.795,10.699) ; v1(142.557,79.295) TP22.1@142.557,80.943 ; IC20.35@143.838,19.968 143.871,20.001 146.181,20.001 v1(146.227,20.047) ; C82.1@145.438,12.796 145.463,12.821 v1(146.539,12.821) ; R81.1@145.891,65.324 v1(145.891,65.988) ; C27.2@146.9,75.633 v1(146.9,77.133) ; 149.208,76.633 149.208,77.281 C28.1@149.335,77.408 149.252,77.491 v1(149.252,78.596) ; C10.1@154.781,48.058 154.802,48.037 v1(154.802,47.401) ; v1(154.87,45.952) 154.87,45.196 C32.1@154.902,45.164 ; v1(154.916,22.952) 154.916,23.8 C64.1@154.918,23.802 ; v1(154.96,33.838) 154.96,33.218 C62.1@154.964,33.214 ; v1(154.964,34.701) 154.964,35.384 C63.1@154.975,35.395 ; v1(155.875,51.868) IC6.5@157.405,51.868 ; v1(156.177,41.213) 156.278,41.213 156.403,41.338 IC4.4@157.506,41.338 ; v1(156.278,39.205) IC13.5@157.505,39.205 ; v1(156.672,8.527) 156.672,7.614 C66.2@156.685,7.601 ; T17.2@158.702,88.068 159.451,88.068 159.576,87.943 v1(159.677,87.943) ; C35.1@158.976,79.77 C35.1@159.022,79.817 ; IC23.1@160.074,4.481 160.074,5.637 ; J10.5@166.167,5.032 v1(166.167,6.843) ; C22.1@166.927,83.593 v1(166.927,84.659) ; 167.327,7.893 v1(167.327,6.843) 167.327,5.142 J10.3@167.437,5.032 ; 167.702,79.053 167.702,78.247 R30.1@167.727,78.222 ; C21.1@168.927,83.643 v1(168.927,84.693) ; v1(172.177,1.993) 172.177,1.166 D9.1@172.212,1.132 ; v1(172.427,83.443) D4.2@172.427,84.493 ; D4.2@172.427,85.643 v1(172.427,86.693) ; v1(175.156,13.27) 176.07,13.27 IC16.2@176.137,13.337 ; FL1.4@176.979,85.058 FL1.4@177.377,84.659 ; FL1.4@177.177,83.993 177.377,83.793 v1(177.377,82.806) ; FL1.4@177.177,85.143 177.377,85.343 v1(177.377,86.453) ; v1(177.527,5.032) IC32.7@177.527,5.693 ; v1(177.594,2.698) 177.652,2.641 177.847,2.641 178.044,2.443 D15.2@179.327,2.443 ; C69.1@178.127,55.793 178.177,55.843 v1(179.127,55.843) ; v1(178.427,87.54) 179.824,87.54 FL1.4@179.977,87.693 ; FL1.4@178.627,84.693 v1(179.977,84.693) ; C68.1@178.702,74.793 178.727,74.818 v1(178.727,75.773) ; v1(178.702,77.363) 179.897,77.363 FL1.4@179.977,77.443 ; C68.1@178.779,74.72 v1(179.977,74.72) ; C65.1@179.952,16.078 C65.1@179.987,16.043 ; IC30.1@180.707,72.543 180.727,72.563 v1(180.727,74.266) ; FL1.4@180.927,76.743 180.977,76.693 v1(180.977,75.668) ; FL1.4@180.927,77.893 180.977,77.943 v1(180.977,79.068) ; v1(181.727,10.493) v1@181.827,10.493 ; FL1.4@182.127,77.443 v1(183.177,77.443) ; v1(182.475,75.118) C114.1@183.652,75.118 ; FL1.4@182.677,88.143 182.761,88.143 183.227,88.609 v1(183.227,89.349) ; v1(184.027,76.44) 184.027,75.293 C114.1@184.177,75.143 ; C114.1@184.427,75.143 v1(185.727,75.143) ; v1(184.902,64.093) 185.702,64.093 C112.1@185.727,64.068 ; v1(185.173,61.693) R58.1@185.987,61.693 ; FL1.4@186.627,87.693 186.78,87.54 v1(187.798,87.54) ; v1(187.127,3.694) T18.2@187.127,4.543 ; C113.1@190.127,70.068 v1(190.127,71.193) ; C167.1@191.627,30.293 191.627,29.747 191.751,29.623 v1(191.751,29.522) ; U1.4@192.897,63.423 v1(192.897,64.73) ; v1(193.913,72.489) 193.913,73.879 R91.1@193.927,73.893 ; R91.1@193.927,74.143 v1(193.927,75.193) ; D16.2@195.736,28.862 195.755,28.843 v1(196.601,28.843) ; T15.2@197.936,47.218 197.961,47.193 v1(198.702,47.193) ; T19.2@201.752,47.218 201.802,47.168 v1(202.602,47.168) ; IC25.41@136.917,44.743 IC25.41@138.167,43.493
  Top Layer w0.245: LD16.1@123.427,88.459 140.977,88.459 v1(140.993,88.443) ; v1(145.452,32.78) R63.2@146.227,32.78 ; v1(156.21,29.621) 156.277,29.555 157.343,29.555 IC14.4@157.494,29.404 ; IC15.5@157.451,27.612 v1(157.451,28.524) ; v1(166.677,68.193) C36.2@166.677,68.943 ; IC5.11@166.906,70.383 166.906,70.12 IC5.11@166.927,70.099 ; v1@167.433,69.843 v1(167.5,69.843) ; IC33.2@189.427,8.443 189.527,8.343 189.527,6.943 C101.1@189.677,6.793 v1(189.677,5.693) ; v1(190.357,42.876) 190.362,42.881 191.157,42.881 C165.1@191.162,42.886 ; v1(190.482,43.88) 190.501,43.899 191.143,43.899 C155.1@191.162,43.918 ; v1(190.627,37.243) 191.366,37.243 C154.1@191.491,37.368 ; v1(203.394,44.124) v1@203.403,44.115
  Top Layer w0.25: v1(15.572,55.875) 16.127,55.875 16.327,55.675 T6A.2@16.327,55.603 ; IC10A.2@40.917,70.923 41.092,70.748 41.526,70.748 41.938,70.335 41.938,70.108 v1(41.986,70.061) ; R177.2@65.507,0.492 v1(65.507,1.743) ; IC42.7@117.28,30.985 IC42.21@117.28,32.623 ; IC42.19@117.28,35.685 117.28,33.985 IC42.21@117.93,33.335 118.58,33.985 IC42.17@118.58,35.685 118.561,35.704 118.561,36.335 118.263,36.633 v1(118.263,36.7) ; IC41.2@118.98,52.61 IC41.21@120.68,52.61 ; C107.2@120.187,22.18 120.776,22.768 v1(120.79,22.768) ; IC40.8@120.251,18.879 120.251,18.229 IC40.17@121.001,17.479 ; IC41.7@120.68,49.61 IC41.21@120.68,51.31 ; IC41.19@120.68,54.31 IC41.21@120.68,52.61 ; IC41.18@121.33,54.31 v2(121.33,51.96) ; IC41.17@121.961,54.329 IC41.17@121.98,54.31 121.98,52.61 v2(121.33,51.96) ; IC41.21@120.68,52.61 v2(121.33,51.96)
  Top Layer w0.3: C45B.1@36.405,23.746 36.405,23.158 36.58,22.982 ; 103.039,64.597 103.521,64.115 103.976,64.115 104.284,64.423 104.284,64.86 104.136,65.008 104.136,65.151 ; IC42.2@115.58,33.985 116.634,33.985 v2(116.7,34.05) ; IC42.21@117.93,34.65 IC42.18@117.93,35.685 ; IC41.21@120.68,51.31 v2(121.33,51.96) ; IC34.19@141.511,59.374 v2(141.511,58.174) IC34.41@142.011,57.674 ; IC34.18@142.011,59.374 IC34.41@142.011,57.674 ; IC34.34@142.511,53.474 142.511,55.674 v2(143.261,56.424) ; 146.018,52.529 145.552,52.529 145.011,53.07 IC34.39@145.011,53.474 v2(145.011,54.674) v2(143.261,56.424) ; IC34.41@142.011,57.674 v2(143.261,56.424)
  Int1 (GND) w0.25: 120.747,21.418 120.747,22.725 v1(120.79,22.768)
  Bottom Layer w0.2: 31.66,9.23 31.668,9.239 32.889,9.239 32.898,9.247 ; v1(36.177,88.847) 37.487,88.847 ; 41.887,88.197 43.077,88.197 43.327,88.447 ; 41.887,88.847 42.927,88.847 43.327,88.447 ; v1(44.207,88.447) 43.327,88.447
  Bottom Layer w0.3: C132.2@6.198,0.45 6.202,0.453 7.134,0.453 v1(7.137,0.457) ; R175.2@6.295,87.934 v1(7.569,87.934)
  other v1: 135.553,-0.999 112.087,1.686 175.156,1.72 119.721,2.18 133.986,2.178 137.061,2.178 126.829,3.069 110.934,3.176 114.34,3.295 119.772,4.671 135.553,5.496 126.845,5.768 32.887,6.143 42.846,6.143 50.444,6.143 59.627,6.143 70.527,6.143 82.747,6.143 91.814,6.143 101.177,7.841 131.966,8.364 106.326,9.253 12.668,9.319 25.792,9.319 129.874,9.492 109.391,9.593 107.22,9.633 103.698,9.945 133.587,9.945 122.606,10.098 119.84,10.12 -0.85,10.47 96.915,10.497 101.177,10.484 118.366,11.239 134.761,11.368 125.029,11.683 122.314,11.962 125.798,12.138 191.65,12.626 95.462,12.782 51.05,13.05 15.763,13.075 88.975,13.136 177.201,13.293 102.518,15.24 130.44,15.312 118.938,15.8 190.677,15.943 124.574,16.284 179.952,16.718 132.473,16.993 7.954,17.807 50.19,17.819 38.98,17.943 118.19,18.054 146.306,18.188 124.61,18.213 42.977,18.356 25.583,18.496 126.845,18.536 99.596,18.958 130.939,18.973 122.924,19.01 125.83,19.138 74.204,19.318 75.251,19.318 15.063,19.478 35.127,19.606 121.78,19.697 90.418,19.733 110.113,19.733 74.722,19.853 124.603,19.996 33.463,20.002 44.927,20.157 131.726,20.668 119.134,20.7 20.531,20.839 68.401,20.913 58.354,21.02 59.852,21.109 16.008,21.219 88.975,21.32 69.942,21.423 34.016,21.576 94.417,21.643 9.834,21.813 26.007,21.803 27.724,21.803 30.955,21.848 -0.061,21.978 115.818,22.05 1.436,22.077 57.463,22.227 23.568,22.295 97.374,22.323 98.567,22.346 95.206,22.413 20.531,22.436 104.273,22.473 53.87,22.5 72.176,22.526 85.009,22.526 83.455,22.554 130.44,22.583 70.68,22.634 86.586,22.634 44.757,22.675 88.581,22.719 50.948,22.828 91.941,22.851 36.961,22.959 52.442,22.959 -1.373,23.143 39.503,23.122 41.749,23.122 8.746,23.212 4.185,23.236 6.977,23.236 95.206,23.364 63.649,23.837 66.221,23.993 -1.447,24.406 61.499,24.391 123.907,24.581 131.277,24.893 7.545,25.031 137.375,25.072 13.731,25.08 16.89,25.08 10.72,25.158 2.163,25.237 74.712,25.288 98.365,25.32 81.967,25.452 71.672,25.463 73.172,25.471 60.257,25.613 -0.602,25.645 86.063,25.667 50.5,25.723 79.411,25.717 43.975,25.802 45.302,25.801 0.86,25.98 58.737,26.19 132.318,26.334 42.976,26.371 34.465,26.405 36.291,26.453 57.619,26.527 37.745,26.819 39.245,26.819 88.439,26.841 95.313,26.982 77.063,27.017 78.663,27.017 82.225,27.017 85.182,27.017 92.089,27.039 93.83,27.138 123.688,27.582 54.881,27.626 56.725,27.626 41.757,27.676 120.969,27.682 91.374,27.969 20.85,28.005 5.541,28.243 16.181,28.285 32.616,28.285 13.731,28.325 30.075,28.325 9.834,28.37 27.348,28.431 86.224,28.663 122.289,28.684 132.296,28.7 47.874,29.017 49.726,29.033 46.04,29.052 66.067,29.043 68.127,29.043 70.127,29.043 72.16,29.052 38.003,29.101 39.503,29.101 26.639,29.151 44.077,29.16 106.168,29.183 18.728,29.269 35.765,29.511 37.03,29.523 15.168,29.894 103.886,29.992 5.318,30.09 131.23,30.103 30.723,30.202 86.224,30.199 85.179,30.228 27.729,30.638 106.168,30.683 114.008,30.708 38.627,30.758 42.758,30.792 14.692,31.138 32.807,31.373 94.374,31.494 103.886,31.492 34.92,31.543 41.122,32.105 106.168,32.183 36.677,32.31 74.887,32.343 14.034,32.515 12.839,32.532 9.377,32.63 94.101,32.66 199.427,32.675 85.728,32.722 103.886,32.992 13.442,33.123 106.168,33.683 14.034,33.721 12.839,33.738 196.822,34.026 81.128,34.348 103.886,34.492 139.579,34.601 106.168,35.183 20.146,35.393 78.067,35.593 81.227,35.646 83.131,35.652 103.886,35.992 198.036,36.193 106.168,36.683 117.535,36.674 140.529,37.087 103.511,37.445 138.82,37.952 141.284,38.021 105.971,38.17 102.45,38.505 0.318,38.649 1.77,39.026 104.932,39.251 -1.006,39.353 101.389,39.566 6.099,39.897 4.603,40.009 198.291,40.186 7.545,40.296 103.871,40.312 100.329,40.627 -1.498,40.77 205.463,40.931 8.874,40.992 10.374,40.992 11.874,40.992 13.374,40.992 14.874,40.992 16.374,40.992 17.874,40.992 19.374,40.992 20.874,40.992 22.374,40.992 23.874,40.992 25.374,40.992 26.874,40.992 28.374,40.992 29.874,40.992 31.374,40.992 32.874,40.992 34.374,40.992 35.874,40.992 37.374,40.992 38.874,40.992 40.374,40.992 41.874,40.992 43.374,40.992 44.874,40.992 46.374,40.992 47.874,40.992 49.374,40.992 50.874,40.992 52.374,40.992 53.874,40.992 55.374,40.992 56.874,40.992 58.374,40.992 59.874,40.992 61.374,40.992 62.874,40.992 64.374,40.992 65.874,40.992 67.374,40.992 68.874,40.992 70.374,40.992 71.874,40.992 73.374,40.992 74.874,40.992 76.374,40.992 77.874,40.992 79.374,40.992 80.874,40.992 82.374,40.992 83.874,40.992 85.374,40.992 86.874,40.992 88.374,40.992 89.874,40.992 91.374,40.992 92.874,40.992 94.374,40.992 95.874,40.992 97.374,40.992 98.874,40.992 102.81,41.373 -0.899,42.145 1.892,42.266 101.75,42.433 4.776,42.522 0.473,42.752 6.21,42.964 7.684,43.24 9.184,43.274 10.684,43.274 12.184,43.274 13.684,43.274 15.184,43.274 16.684,43.274 18.184,43.274 19.684,43.274 21.184,43.274 22.684,43.274 24.184,43.274 25.684,43.274 27.184,43.274 28.684,43.274 30.184,43.274 31.684,43.274 33.184,43.274 34.684,43.274 36.184,43.274 37.684,43.274 39.184,43.274 40.684,43.274 42.184,43.274 43.684,43.274 45.184,43.274 46.684,43.274 48.184,43.274 49.684,43.274 51.184,43.274 52.684,43.274 54.184,43.274 55.684,43.274 57.184,43.274 58.684,43.274 60.184,43.274 61.684,43.274 63.184,43.274 64.684,43.274 66.184,43.274 67.684,43.274 69.184,43.274 70.684,43.274 72.184,43.274 73.684,43.274 75.184,43.274 76.684,43.274 78.184,43.274 79.684,43.274 81.184,43.274 82.684,43.274 84.184,43.274 85.684,43.274 87.184,43.274 88.684,43.274 90.184,43.274 91.684,43.274 93.184,43.274 94.684,43.274 96.184,43.274 97.684,43.274 99.184,43.274 100.502,43.266 146.514,48.257 144.511,48.271 16.924,49.197 102.764,49.915 141.327,49.943 126.55,50.15 131.45,50.256 139.495,50.316 114.172,50.943 141.117,51.284 147.227,51.543 145.727,52.543 116.699,52.945 114.2,53.043 133.17,53.33 115.551,54.343 15.164,54.843 37.724,54.89 139.372,54.874 8.077,54.943 98.077,55.282 42.977,55.425 44.991,55.425 82.527,55.406 50.627,55.443 114.195,55.652 116.895,55.652 35.013,57.171 24.829,57.531 43.607,57.651 22.865,57.805 67.827,57.843 69.627,57.843 57.927,57.943 16.374,58.201 10.427,58.643 32.264,58.671 34.134,58.665 14.349,58.719 26.027,58.743 28.427,58.743 30.727,58.743 17.327,58.943 0.597,59.039 22.353,59.06 107.732,59.077 194.281,59.143 110.807,59.351 23.677,59.384 99.446,59.393 39.184,59.434 51.927,59.443 54.027,59.443 57.127,59.443 70.027,59.543 71.827,59.543 20.829,59.589 44.824,59.589 50.176,59.589 85.385,59.574 88.689,59.719 36.795,59.989 92.027,60.112 41.986,60.189 17.327,60.443 141.774,60.443 4.927,60.543 7.327,60.543 39.904,60.583 107.053,60.681 62.037,60.882 93.377,60.897 95.02,60.913 63.949,60.938 66.273,60.948 156.128,61.068 170.686,61.068 -1.564,61.343 7.489,61.943 9.027,61.943 15.627,61.943 17.227,61.943 10.827,62.043 13.227,62.043 97.704,62.044 82.107,62.498 71.15,62.676 85.229,62.696 41.986,62.74 44.788,62.74 79.469,62.788 86.886,62.801 193.978,62.818 50.317,62.869 59.652,63.091 34.134,63.122 0.561,63.343 39.08,63.753 57.184,63.891 88.374,63.89 92.052,64.03 94.167,64.03 44.027,64.043 95.349,64.166 77.23,64.205 20.534,64.935 9.933,65.022 13.227,65.073 18.357,65.123 5.977,65.146 15.627,65.147 32.7,65.367 140.993,65.637 42.327,65.843 30.923,65.906 29.927,65.953 73.787,66.016 44.305,66.043 66.327,66.043 68.327,66.043 70.127,66.043 17.406,66.063 46.536,66.143 48.327,66.143 50.19,66.143 26.639,66.194 137.677,66.193 39.927,66.243 37.515,66.297 52.686,66.297 18.606,66.334 35.303,66.603 106.285,66.651 98.735,67.193 104.002,67.2 64.729,67.269 29.953,67.616 35.712,67.766 26.651,67.791 42.676,67.794 59.098,67.794 34.011,67.893 93.821,67.943 106.285,68.151 31.545,68.21 104.002,68.7 77.297,68.714 14.949,68.789 44.265,68.885 40.927,69.098 64.729,69.274 136.42,69.29 72.485,69.333 20.071,69.455 84.861,69.544 26.575,69.599 32.518,69.595 106.285,69.651 12.95,69.75 14.175,69.75 92.705,69.905 104.002,70.2 13.552,70.369 57.623,70.659 44.929,70.68 167.553,70.702 23.384,70.806 36.519,70.943 38.769,70.948 12.95,70.975 14.15,70.975 83.473,70.994 106.285,71.151 136.42,71.402 21.255,71.523 111.938,71.643 121.017,71.643 104.002,71.7 15.341,71.828 55.277,71.953 171.627,72.043 32.912,72.073 69.4,72.242 164.239,72.355 78.034,72.515 13.302,72.663 83.298,72.66 106.285,72.651 61.177,72.693 167.825,72.75 17.941,72.815 42.051,72.886 103.957,73.199 167.602,73.468 167.334,74.056 106.147,74.145 102.897,74.26 168.655,74.33 171.552,74.345 105.133,75.251 101.836,75.32 170.116,75.433 165.189,75.543 -0.065,75.729 1.432,75.825 104.073,76.311 100.775,76.381 4.244,76.552 165.906,77.001 103.012,77.372 8.471,77.449 99.715,77.441 9.844,78.052 11.344,78.052 12.844,78.052 14.344,78.052 15.844,78.052 17.344,78.052 18.844,78.052 20.344,78.052 21.844,78.052 23.344,78.052 24.844,78.052 26.344,78.052 27.844,78.052 29.344,78.052 30.844,78.052 32.344,78.052 33.844,78.052 35.344,78.052 36.844,78.052 38.344,78.052 39.844,78.052 41.344,78.052 42.844,78.052 44.344,78.052 45.844,78.052 47.344,78.052 48.844,78.052 50.344,78.052 51.844,78.052 53.344,78.052 54.844,78.052 56.344,78.052 57.844,78.052 59.344,78.052 60.844,78.052 62.344,78.052 63.844,78.052 65.344,78.052 66.844,78.052 68.344,78.052 69.844,78.052 71.344,78.052 72.844,78.052 74.344,78.052 75.844,78.052 77.344,78.052 78.844,78.052 80.344,78.052 81.844,78.052 83.344,78.052 84.844,78.052 86.344,78.052 87.844,78.052 89.344,78.052 90.844,78.052 92.344,78.052 93.844,78.052 95.344,78.052 96.844,78.052 98.344,78.052 166.477,78.218 168.927,78.218 101.951,78.433 164.1,78.87 5.154,78.936 100.891,79.493 6.514,79.57 0.864,79.73 157.427,79.77 160.502,79.77 120.493,79.815 7.917,80.101 9.399,80.334 10.899,80.334 12.399,80.334 13.899,80.334 15.399,80.334 16.899,80.334 18.399,80.334 19.899,80.334 21.399,80.334 22.899,80.334 24.399,80.334 25.899,80.334 27.399,80.334 28.899,80.334 30.399,80.334 31.899,80.334 33.399,80.334 34.899,80.334 36.399,80.334 37.899,80.334 39.399,80.334 40.899,80.334 42.399,80.334 43.899,80.334 45.399,80.334 46.899,80.334 48.399,80.334 49.899,80.334 51.399,80.334 52.899,80.334 54.399,80.334 55.899,80.334 57.399,80.334 58.899,80.334 60.399,80.334 61.899,80.334 63.399,80.334 64.899,80.334 66.399,80.334 67.899,80.334 69.399,80.334 70.899,80.334 72.399,80.334 73.899,80.334 75.399,80.334 76.899,80.334 78.399,80.334 79.899,80.334 81.399,80.334 82.899,80.334 84.399,80.334 85.899,80.334 87.399,80.334 88.899,80.334 90.399,80.334 91.899,80.334 93.399,80.334 94.899,80.334 96.399,80.334 97.899,80.334 99.643,80.326 107.053,81.362 145.421,83.799 174.936,85.058 17.465,85.337 36.094,85.439 63.844,85.439 92.705,85.439 183.227,85.598 3.658,86.305 125.002,88.459 127.82,88.459 130.389,88.459 133.049,88.459 135.598,88.459 138.453,88.459 13.257,88.781 71.027,88.847 8.373,90.33
  other v2: 54.881,20.092 75.251,20.092 55.947,20.103 74.073,20.103 55.413,20.424 74.722,20.622 54.763,20.774 56.013,20.774 74.073,20.774 75.448,20.783 55.413,21.124 74.755,21.278 75.448,21.35 54.763,21.524 56.013,21.524 74.073,21.643 74.755,21.852 55.413,21.924 54.763,22.274 56.013,22.274 74.073,22.274 75.448,22.274 55.413,22.524 74.717,22.775 55.377,24.574 89.958,24.578 90.858,24.578 28.039,24.943 28.783,24.943 29.475,24.943 89.358,25.078 90.358,25.078 91.308,25.088 28.411,25.541 29.115,25.541 89.858,25.578 90.858,25.578 89.371,26.008 90.277,25.993 91.315,26.008 29.475,26.148 27.983,26.193 28.677,26.193 28.385,26.764 29.135,26.757 27.983,27.323 28.727,27.323 29.475,27.323 119.22,31.995 116.7,32.03 118.013,32.03 116.7,32.675 119.213,32.675 116.7,33.364 118.013,33.36 119.22,33.388 119.213,34.05 116.7,34.65 118.013,34.65 119.22,34.65 136.418,41.747 138.184,41.753 139.918,41.747 137.307,42.598 139.043,42.622 136.431,43.497 138.168,43.497 139.918,43.497 137.308,44.357 139.026,44.357 136.418,45.247 138.184,45.247 139.918,45.247 121.325,50.625 120,50.65 122.65,50.65 120,51.305 122.65,51.329 120,51.959 122.65,51.959 120,52.614 122.65,52.61 120,53.269 122.65,53.25 121.325,53.3 141.511,54.674 143.277,54.68 142.4,55.525 144.136,55.549 141.523,56.424 145.011,56.424 55.052,56.918 55.727,56.918 142.401,57.284 144.119,57.284 74.771,57.408 55.413,57.424 74.121,57.758 75.371,57.758 54.763,57.774 56.013,57.774 74.771,58.108 55.413,58.124 143.277,58.174 145.011,58.174 54.763,58.524 56.013,58.524 74.121,58.508 75.371,58.508 74.771,58.908 55.413,58.924 74.121,59.258 75.371,59.258 54.763,59.274 56.013,59.274 74.771,59.508 55.413,59.524 74.743,60.913 91.371,61.153 89.358,61.178 90.333,61.183 55.452,61.46 89.958,61.578 90.858,61.578 74.752,61.793 28.039,61.943 28.783,61.943 29.475,61.943 89.358,62.078 90.358,62.078 91.308,62.088 28.411,62.541 29.115,62.541 89.858,62.578 90.858,62.578 90.277,62.993 89.371,63.008 91.315,63.008 29.475,63.148 27.983,63.193 28.677,63.193 28.353,63.753 29.102,63.773 27.983,64.323 28.727,64.323 29.475,64.323 137.829,71.796 139.078,71.796 140.439,71.796 141.259,71.796 142.508,71.796 143.869,71.796 133.652,71.866 139.859,72.156 143.289,72.156 134.433,72.226 138.453,72.242 141.883,72.242 133.027,72.313 137.829,72.689 140.39,72.689 141.259,72.689 143.82,72.689 139.078,72.742 142.508,72.742 132.403,72.759 134.964,72.759 133.652,72.813 138.453,73.156 139.908,73.156 141.883,73.156 143.338,73.156 133.027,73.226 134.482,73.226 139.078,73.713 142.508,73.713 140.488,73.73 143.918,73.73 137.829,73.746 141.259,73.746 133.652,73.783 139.772,74.069 143.239,74.157 137.829,74.533 139.078,74.533 140.439,74.533 141.229,74.566 142.478,74.566 143.839,74.566 139.859,74.893 143.259,74.926 138.453,74.979 141.853,75.013 137.829,75.425 140.39,75.425 141.229,75.459 143.79,75.459 139.078,75.479 142.478,75.513 138.453,75.893 139.908,75.893 141.853,75.926 143.308,75.926 139.078,76.45 137.829,76.483 140.488,76.466 142.478,76.483 143.888,76.5 141.229,76.516
  other v3: 126.331,-0.488 120.061,48.587 112.157,66.719 5.352,66.867 120.68,68.519 69.1,69.17 9.705,69.489 122.747,69.763 121.958,75.375 112.125,75.95 109.875,78.75
HWREV0: IC20.29 IC25.11 R75.2 | length 50.7
  Top Layer w0.2: IC25.11@140.417,46.443 140.442,46.418 v1(141.152,46.418) ; v1(142.613,16.968) 144.877,16.968 144.913,17.004 145.309,17.004 145.635,16.678 145.642,16.678 145.832,16.488 R75.2@145.832,16.468 ; v1(149.944,46.462) 149.944,43.647 150.151,43.441 150.151,43.045 150.001,42.895 150.001,17.248 v1(150.275,16.974)
  Int2 (PWR) w0.15: v1(141.152,46.418) 141.174,46.44 149.922,46.44 v1(149.944,46.462) ; v1(142.613,16.968) 142.616,16.971 144.914,16.971 145.197,17.254 148.179,17.254 148.462,16.971 150.272,16.971 v1(150.275,16.974)
HWREV1: IC20.30 IC25.12 R76.2 | length 82.2
  Top Layer w0.2: v1(139.908,48.587) 140.257,48.238 140.257,47.329 139.917,46.989 IC25.12@139.917,46.443 ; v1(142.011,17.493) 142.023,17.481 143.825,17.481 IC20.30@143.838,17.468 145.807,17.468 R76.2@145.832,17.493
  Int2 (PWR) w0.15: v1(122.924,19.651) 123.835,18.739 124.756,18.739 125.977,17.518 ; v1(124.527,48.043) 124.565,48.043 124.79,48.268 139.589,48.268 v1(139.908,48.587) ; 126.063,17.493 v1(142.011,17.493)
  Bottom Layer w0.2: v1(122.924,19.651) 122.924,20.77 123.264,21.111 123.264,23.218 123.302,23.256 123.302,26.647 122.915,27.034 122.915,27.735 123.233,28.054 123.233,46.749 123.688,47.204 123.688,53.381 123.805,53.498 124.104,53.498 124.527,53.076 v1(124.527,48.043)
HWREV2: IC20.3 IC25.13 R77.2 | length 71.9
  Top Layer w0.2: R77.2@132.645,19.912 132.645,19.892 133.043,19.493 ; 133.13,19.468 v1(133.952,19.468) IC20.3@135.188,19.468 ; IC25.13@139.417,46.443 139.417,47.01 139.572,47.165 v1(139.572,47.693)
  Int2 (PWR) w0.15: v1(122.606,21.127) 132.231,21.127 ; v1(125.027,47.193) 125.027,47.721 125.295,47.989 139.191,47.989 139.486,47.693 v1(139.572,47.693) ; 132.318,21.102 v1(133.952,19.468)
  Bottom Layer w0.2: v1(122.606,21.127) 122.588,21.145 122.588,27.868 122.906,28.187 122.906,46.885 123.233,47.212 123.233,53.506 123.552,53.825 124.24,53.825 125.027,53.038 v1(125.027,47.193)
HWREV3: IC20.4 IC25.14 R78.2 | length 50.9
  Top Layer w0.2: R78.2@132.598,18.973 R78.2@132.604,18.98 ; R78.2@132.691,18.954 v1(133.592,18.954) ; v1@133.602,18.968 IC20.4@135.188,18.968 ; IC25.14@138.917,46.443 138.922,46.448 138.922,47.188 v1(138.927,47.193)
  Int2 (PWR) w0.15: v1(126.264,20.675) 126.74,20.675 126.814,20.601 130.272,20.601 131.88,18.993 ; v1(126.327,47.535) 132.453,47.535 132.585,47.668 138.452,47.668 v1(138.927,47.193) ; 131.967,18.968 133.579,18.968 v1(133.592,18.954)
  Bottom Layer w0.2: 126.24,25.517 126.264,25.493 v1(126.264,20.675) ; 126.327,25.492 v1(126.327,47.535)
I_bias0_0: IC20.18 IC25.1 R62A.1 T1.1 T6A.1 | length 335.9
  Top Layer w0.152: T6A.1@14.173,55.584 T6A.1@14.214,55.625
  Top Layer w0.2: R62A.1@13.033,55.584 T6A.1@14.173,55.584 ; T6A.1@14.214,55.625 14.214,55.8 14.249,55.835 14.459,55.835 T6A.1@14.459,55.513 ; T6A.1@14.427,55.603 15.079,55.603 15.641,55.041 15.641,54.76 15.758,54.643 19.439,54.643 19.848,55.052 v1(19.848,56.513) ; T1.1@49.412,89.063 49.629,88.847 v1(50.392,88.847) ; IC20.18@139.263,13.393 v1(139.263,16.182) ; IC25.1@141.117,41.243 141.132,41.228 142.03,41.228 v1(142.045,41.213) ; v1(151.77,16.015) 151.77,23.826 152.079,24.136 152.079,25.943 151.799,26.223 v1(151.799,38.672) 151.847,38.72 151.799,38.769 v1(151.799,41.143)
  Int2 (PWR) w0.15: v1(19.848,56.513) 19.141,56.513 18.96,56.332 18.299,56.332 18.154,56.477 18.154,57.553 20.642,60.041 20.649,60.041 21.198,60.59 21.198,66.841 22.089,67.731 25.835,67.731 26.266,67.3 26.863,67.3 27.221,66.943 30.619,66.943 32.248,65.313 32.248,65.18 32.513,64.915 32.647,64.915 33.988,63.574 36.226,63.574 36.576,63.224 43.237,63.224 43.66,63.647 43.66,63.771 43.575,63.856 43.575,64.23 43.84,64.495 44.214,64.495 44.299,64.41 44.423,64.41 45.786,65.773 45.786,66.032 46.372,66.619 52.368,66.619 52.499,66.749 52.873,66.749 53.004,66.619 83.002,66.619 85.726,63.894 86.888,63.894 88.906,61.876 88.906,60.991 89.333,60.564 92.422,60.564 93.08,59.906 96.959,59.906 99.966,62.913 104.058,62.913 105.629,61.342 105.629,60.998 106.396,60.232 106.864,60.232 106.866,60.229 107.24,60.229 107.748,60.737 v1(110.937,60.737) ; v1(50.392,88.847) 50.457,88.847 50.655,88.649 51.114,88.649 51.618,88.145 70.698,88.145 70.725,88.118 86.037,88.118 86.218,88.298 91.773,88.298 92.22,88.745 92.594,88.745 93.291,88.048 93.293,88.048 95.856,85.485 104.933,85.485 106.257,86.809 v1(111.649,86.809) ; v1(112.187,36.96) 112.619,37.391 131.447,37.391 132.306,36.532 133.282,36.532 ; 133.369,36.507 133.65,36.788 140.188,36.788 140.341,36.635 145.683,36.635 145.711,36.664 151.053,36.664 151.209,36.507 151.808,36.507 151.896,36.595 151.896,37.681 151.799,37.778 v1(151.799,38.672) ; v1(139.263,16.182) 141.889,16.182 142.425,15.646 149.696,15.646 150.064,16.015 v1(151.77,16.015) ; v1(142.045,41.213) 142.085,41.173 151.163,41.173 151.193,41.143 v1(151.799,41.143)
  Bottom Layer w0.2: v1(111.649,86.809) 111.66,86.799 111.66,85.411 112.105,84.966 112.517,84.966 112.541,84.99 113.105,84.99 113.916,84.179 113.916,66.657 113.185,65.926 113.175,65.926 112.407,65.159 112.407,63.955 110.994,62.541 110.994,60.795 v1(110.937,60.737) 111.747,59.928 111.747,43.331 111.765,43.314 111.765,38.549 112.448,37.866 112.448,37.471 112.244,37.267 112.244,37.017 v1(112.187,36.96)